# Altium PCB MotorControllerInterface.PcbDoc
Units mm, origin at the board's own origin, x right, y up, seen from the top; angles counter-clockwise.
Board outline 50 x 50 mm, 2 copper layers (Top Layer, Bottom Layer); 33 components, 24 nets, 214 pads, 53 vias.
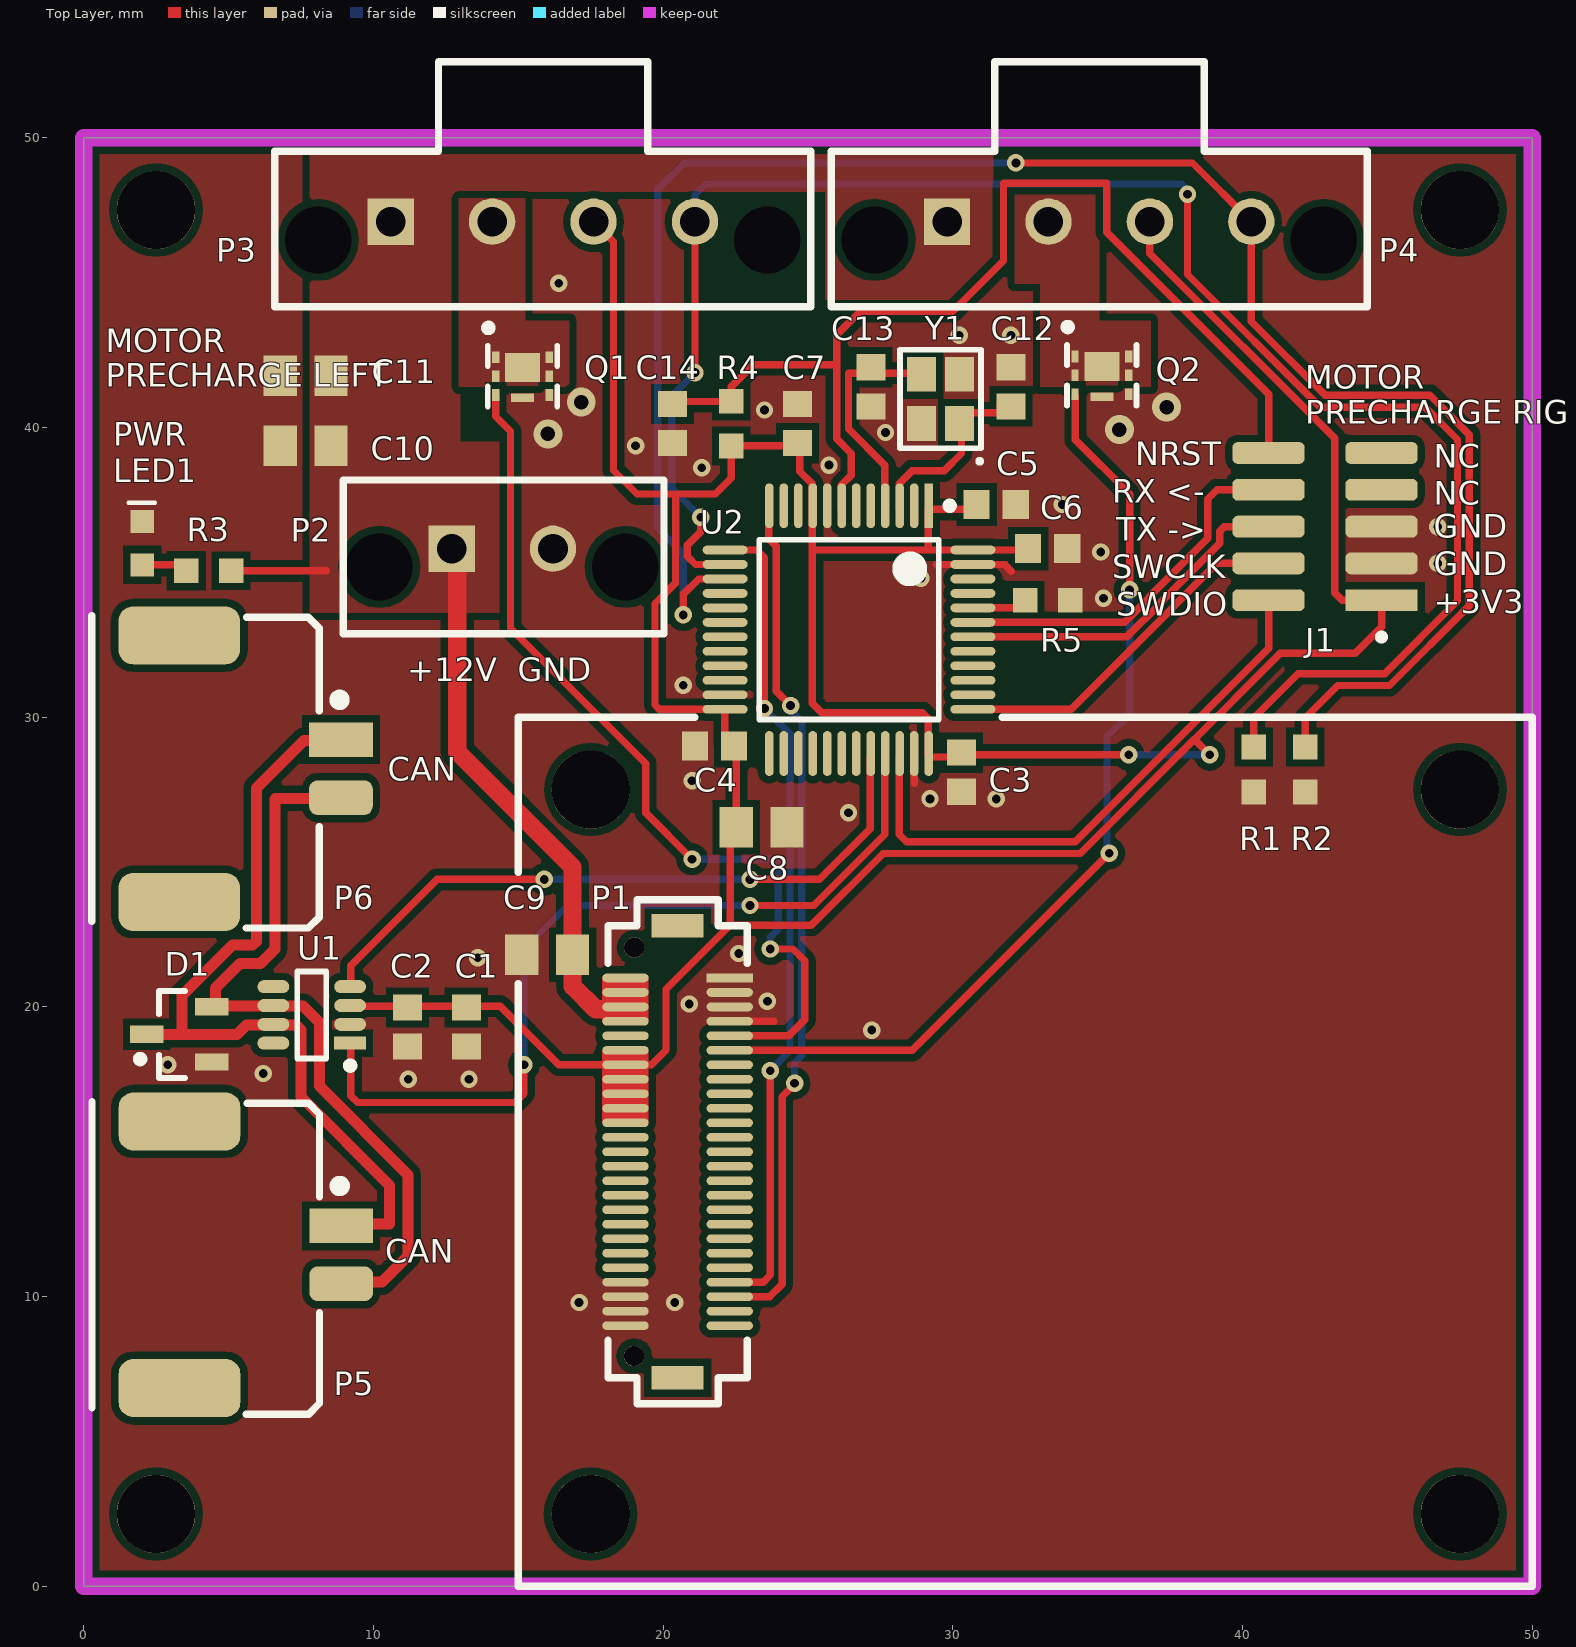
[diagram p0: Top Layer view]
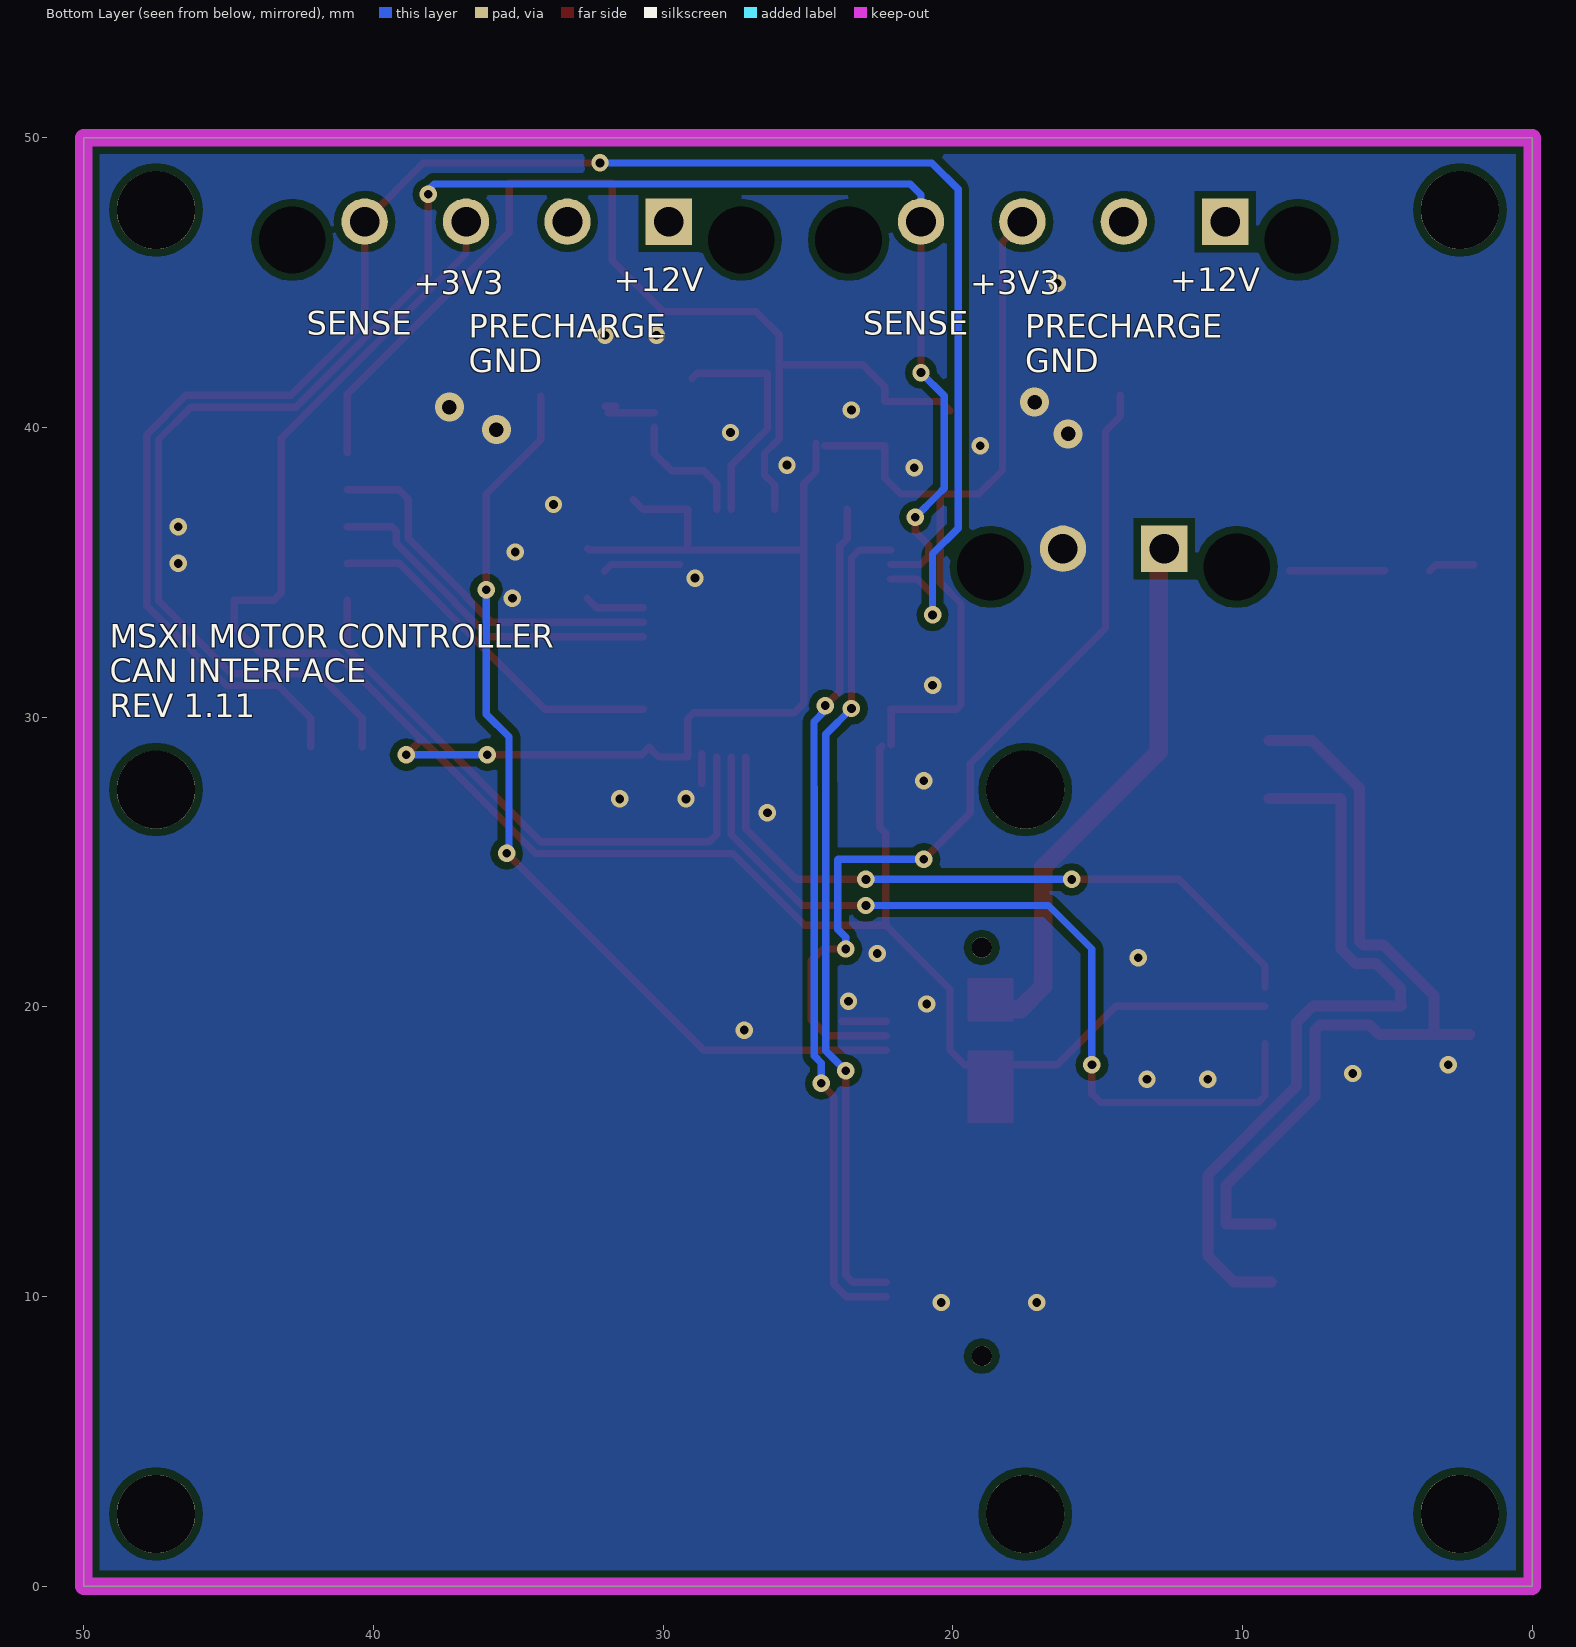
[diagram p1: Bottom Layer view, seen from below]
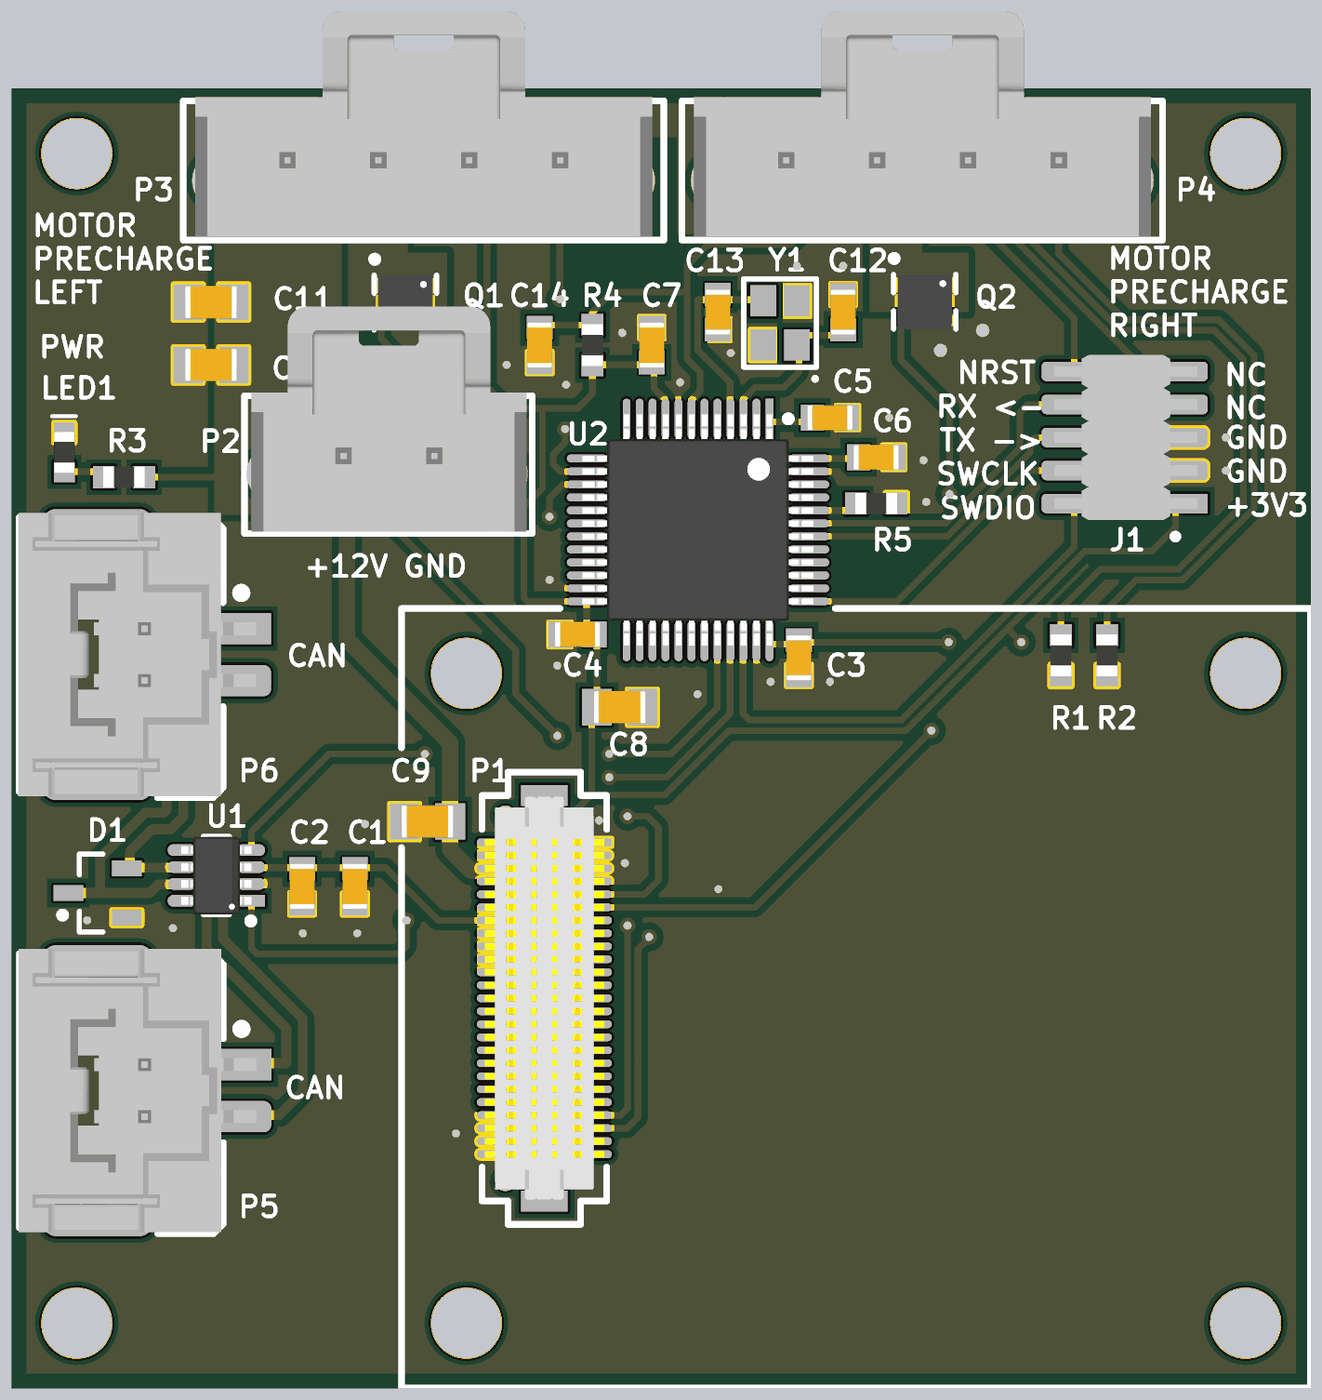
[diagram p2: 3D render of the assembled board from above, using the file's embedded part models]

## Layer stack, top to bottom
Top Solder: solder mask 0.0102, Solder Resist, Dk 3.5
Top Layer: signal copper 0.0356
Dielectric 1: dielectric 0.32, FR-4, Dk 4.8
Bottom Layer: signal copper 0.0356
Bottom Solder: solder mask 0.0102, Solder Resist, Dk 3.5

## Board outline
0,0 50,0 50,50 0,50

## Design rules (kind name [scope] priority, off if disabled: settings)
Clearance [All] p1: gap=0.254 ignorepadtopadclearanceinfootprint=FALSE except(0: Arc-Hole Track-Hole SMDPad-Hole THPad-Hole Via-Hole Fill-Hole Poly-Hole Region-Hole Text-Hole; 0.152: Arc-Arc Arc-Track Arc-SMDPad Track-Track Track-SMDPad SMDPad-SMDPad)
DiffPairsRouting [All] p1: maxlimit=0.254 minlimit=0.254 mostfreqgap=0.254 toplayer_minwidth=0.381 toplayer_maxwidth=0.381 toplayer_prefwidth=0.381 bottomlayer_minwidth=0.381 bottomlayer_maxwidth=0.381 bottomlayer_prefwidth=0.381 maxuncoupledlength=12.7
PolygonConnect [All] p1: connectstyle=Direct reliefconductorwidth=0.254 reliefentries=4 polygonreliefangle="90 Angle" airgapwidth=0.254
RoutingVias [All] p1: holewidth=0.711 width=1.27 viastyle="Through Hole" minholewidth=0.711 minwidth=1.27 maxholewidth=0.711 maxwidth=1.27
SolderMaskExpansion [All] p1: expansion=0.102
Width [All] p1: maxlimit=1.27 minlimit=0.254 preferedwidth=0.254 minimp=50.000000 maximp=50.000000 favimp=50.000000
29 further rules are at their usual default settings.

## Classes and differential pairs
component class Mezzanine: P1
differential pair CAN: +CAN_P -CAN_N

## Components (designator, comment, footprint, x,y, rotation, side; value= is the part's Value field where it differs from the comment)
C1 "CAP CER 4.7UF 25V 10% X5R 0603" "CAP, 0603" 13.208,19.304 r270 top
C2 "CAP CER 0.1UF 50V 10% X7R 0603" "CAP, 0603" 11.176,19.304 r270 top
C3 "CAP CER 0.1UF 50V 10% X7R 0603" "CAP, 0603" 30.3,28.1 r270 top
C4 "CAP CER 0.1UF 50V 10% X7R 0603" "CAP, 0603" 21.775,29 r180 top
C5 "CAP CER 0.1UF 50V 10% X7R 0603" "CAP, 0603" 31.496,37.338 r0 top
C6 "CAP CER 0.1UF 50V 10% X7R 0603" "CAP, 0603" 33.274,35.814 r0 top
C7 "CAP CER 0.1UF 50V 10% X7R 0603" "CAP, 0603" 24.638,40.132 r90 top
C8 "CAP CER 10uF 25V 10% X5R 0805" "CAP, 0805" 23.4,26.2 r0 top
C9 "CAP CER 10uF 25V 10% X5R 0805" "CAP, 0805" 16,21.8 r180 top
C10 "CAP CER 10uF 25V 10% X5R 0805" "CAP, 0805" 7.666,39.37 r180 top
C11 "CAP CER 10uF 25V 10% X5R 0805" "CAP, 0805" 7.666,41.783 r180 top
C12 "CAP CER 15PF 50V ±5% NPO 0603" "CAP, 0603" 32.004,41.402 r90 top
C13 "CAP CER 15PF 50V ±5% NPO 0603" "CAP, 0603" 27.178,41.402 r270 top
C14 "CAP CER 0.1UF 50V 10% X7R 0603" "CAP, 0603" 20.32,40.132 r270 top
D1 "DIODE TVS 24VWM 70VC SOT23" SOT23 3.302,19.05 r180 top
J1 "CONN 10POS HEADR MALE 0.05\"" "CONN, 10POS 0.05\" Debug Header" 44.794,34.036 r90 top
LED1 "LED GREEN CLEAR 2V 0603" LED_0603 2.032,35.306 r90 top
P1 "CONN 50POS Bergstak Plug 0.02\"" "CONN, Bergstak 50 Pos Plug" 20.5,15 r0 top
P2 "CONN 2POS ULTRA-FIT 0.138\"" "CONN, 2POS ULTRA-FIT" 12.7,35.814 r0 top
P3 "CONN 4POS ULTRA-FIT 0.138\"" "CONN, 4POS ULTRA-FIT" 10.6,47.1 r0 top
P4 "CONN 4POS ULTRA-FIT 0.138\"" "CONN, 4POS ULTRA-FIT" 29.8,47.1 r0 top
P5 "Dura-Clik" "CONN, 2POS Dura-Click Vertical" 8.89,12.446 r270 top
P6 "Dura-Clik" "CONN, 2POS Dura-Click Vertical" 8.882,29.222 r270 top
Q1 "MOSFET N-CH 30V 8.7A 2.1W 6-PQFN (2x2)" "MOSFET N-CH 30V 12A 2mmx2mm PQFN" 14.224,42.418 r270 top
Q2 "MOSFET N-CH 30V 8.7A 2.1W 6-PQFN (2x2)" "MOSFET N-CH 30V 12A 2mmx2mm PQFN" 34.218,42.448 r270 top
R1 "RES 10K OHM 1% 1/10W 0603" "RES, 0603" 40.386,28.194 r270 top
R2 "RES 10K OHM 1% 1/10W 0603" "RES, 0603" 42.164,28.194 r270 top
R3 "RES 4.7K OHM 1% 1/10W 0603" "RES, 0603" 4.318,35.052 r180 top
R4 "RES 100K OHM 5% 1/8W 0603" "RES, 0603" 22.352,40.132 r90 top
R5 "RES 510 OHM 5% 1/10W 0603" "RES, 0603" 33.274,34.036 r180 top
U1 "IC CAN Tranceiver TCAN332DR" TSOP65P280X145-8N 7.874,19.724 r180 top
U2 "IC MCU 32BIT 128KB FLASH 48LQFP" TSQFP50P890X890X160-48M 26.416,33.02 r270 top
Y1 "CRYSTAL 32 MHz 8pF 4-SMD" "CX2520DB CRYSTAL" 30.226,40.132 r90 top

## Footprints (in the part's own frame and the unit in brackets; to place one, negate y for a bottom-side part, rotate by r counter-clockwise, add the part's x,y. Pads: shape width x height; smd on the part's side, far side on the other; paste and mask are expansions set on the pad)
"CAP, 0603" [mm] "Chip Capacitor, 2-Leads, Body 1.60x0.81mm, IPC Medium Density"
  rect 0.9x1 smd mask+0.076: 1(-0.675,0) 2(0.675,0)
  body extent -0.87,-0.48 0.87,0.48, height 0.9
"CAP, 0805" [mm] "Chip Capacitor, 2-Leads, Body 2.00x1.25mm, IPC Medium Density"
  rect 1.15x1.4 smd: 1(-0.875,0) 2(0.875,0)
  body extent -1,-0.63 1,0.63, height 1.25
"CONN, 2POS Dura-Click Vertical" [mm] "WM7169CT-ND"
  rect 1.2x2.2 smd: 1(0,0)
  rrect50% 1.2x2.2 smd: 2(2,0)
  rrect50% 2x4.2 smd: 3(-3.6,-5.58) 3(5.6,-5.58)
  silkscreen extent -4.28,-8.6 6.5,0.05, body extent -4.45,-8.63 6.45,0.52, height 8
"CONN, 2POS ULTRA-FIT" [mm] "2 Positions Header, Shrouded Connector 0.138\" (3.50mm) Through Hole Gold"
  rect 1.6x1.6 hole 1.02: 1(0,0)
  round 1.6 hole 1.02: 2(3.5,0)
  round 1.6 hole 2.3: ""(-2.5,-0.63) ""(6,-0.63)
  silkscreen extent -3.74,-2.93 7.33,2.37, body extent -3.48,-2.87 7.12,5.79, height 13.85
"CONN, 4POS ULTRA-FIT" [mm]
  rect 1.6x1.6 hole 1.02: 1(0,0)
  round 1.6 hole 1.02: 2(3.5,0) 3(7,0) 4(10.5,0)
  round 0 hole 2.3: ""(-2.5,-0.63) ""(13,-0.63)
  silkscreen extent -4,-2.93 14.5,5.53, body extent -3.54,-2.78 14.06,5.88, height 13.85
"CONN, 10POS 0.05\" Debug Header" [mm] "Amphenol 10 Positions Header Connector 0.050\" (1.27mm) Surface Mount Gold"
  rect 0.75x2.5 smd: 1(0,0)
  rrect50% 0.75x2.5 smd: 2(0,3.9) 3(1.27,0) 4(1.27,3.9) 5(2.54,0) 6(2.54,3.9) 7(3.81,0) 8(3.81,3.9) 9(5.08,0) 10(5.08,3.9)
  silkscreen extent -1.37,-0.1 -1.17,0.1, body extent -0.63,-0.84 5.72,4.66, height 4.5
"CONN, Bergstak 50 Pos Plug" [mm] "Bergstak 50 Position Plug"
  rect 1.6x0.3 smd: 1(1.8,6)
  oval 1.6x0.3 smd: 2(1.8,5.5) 3(1.8,5) 4(1.8,4.5) 5(1.8,4) 6(1.8,3.5) 7(1.8,3) 8(1.8,2.5) 9(1.8,2) 10(1.8,1.5) 11(1.8,1) 12(1.8,0.5) 13(1.8,0) 14(1.8,-0.5) 15(1.8,-1) 16(1.8,-1.5) 17(1.8,-2) 18(1.8,-2.5) 19(1.8,-3) 20(1.8,-3.5) 21(1.8,-4) 22(1.8,-4.5) 23(1.8,-5) 24(1.8,-5.5) 25(1.8,-6) 26(-1.8,-6) 27(-1.8,-5.5) 28(-1.8,-5) 29(-1.8,-4.5) 30(-1.8,-4) 31(-1.8,-3.5) 32(-1.8,-3) 33(-1.8,-2.5) 34(-1.8,-2) 35(-1.8,-1.5) 36(-1.8,-1) 37(-1.8,-0.5) 38(-1.8,0) 39(-1.8,0.5) 40(-1.8,1) 41(-1.8,1.5) 42(-1.8,2) 43(-1.8,2.5) 44(-1.8,3) 45(-1.8,3.5) 46(-1.8,4) 47(-1.8,4.5) 48(-1.8,5) 49(-1.8,5.5) 50(-1.8,6)
  round 0.7 hole 0.7: ""(-1.5,-7.05) ""(-1.5,7.05)
  rect 1.8x0.8 smd: ""(0,-7.8) ""(0,7.8)
  silkscreen extent -2.4,-8.7 2.4,8.7, body extent -2.3,-7.75 2.3,7.75, height 4.2
"CX2520DB CRYSTAL" [mm]
  rect 1.2x1 smd: 1(0,0) 2(1.7,0) 3(1.7,1.3) 4(0,1.3)
  silkscreen extent -1.35,-0.75 2.55,2.05, body extent -0.4,-0.35 2.1,1.65, height 0.5
LED_0603 [mm]
  rect 0.8x0.8 smd: 1(-0.05,0.01) 2(1.45,0.01)
  silkscreen extent 2.09,-0.43 2.09,0.48, body extent -0.1,-0.39 1.5,0.41, height 0.55
"MOSFET N-CH 30V 12A 2mmx2mm PQFN" [mm] "PQFN, 6-Leads, Body 2.00x2.00mm, Pitch 0.65mm/0.50mm, Thermal Pad 1.00x1.20mm, IPC Medium Density"
  rect 0.4x0.25 smd: 1(0,0) 2(0.65,0) 3(1.3,0) 4(1.3,1.85) 5(0.65,1.85) 6(0,1.85)
  rect 1x1.2 smd: 7(0.35,0.925)
  rect 0.3x0.79 smd: 8(1.39,0.925)
  silkscreen extent -1.14,-0.38 1.7,2.12, body extent -0.4,-0.13 1.7,1.97, height 1
"RES, 0603" [mm] "Chip Resistor, 2-Leads, Body 1.60x0.80mm, IPC Medium Density"
  rect 0.85x0.85 smd: 1(-0.775,0) 2(0.775,0)
  body extent -0.8,-0.4 0.8,0.4, height 0.55
SOT23 [mm] "SOT23, 3-Leads, Body 2.9x1.3mm, Pitch 0.95mm, Lead Span 2.3mm - Reverse Pinning, IPC Medium Density"
  rect 1.15x0.6 smd: 1(1.125,0) 2(-1.125,-0.95) 3(-1.125,0.95)
  silkscreen extent -0.2,-1.5 1.47,1.5, body extent -0.7,-1.5 0.7,1.5, height 1.1
TSOP65P280X145-8N [mm] "TSOP, 8-Leads, Body 2.90x1.60mm, Pitch 0.65mm, IPC Medium Density"
  rect 1.1x0.45 smd: 1(-1.325,0.975)
  oval 1.1x0.45 smd: 2(-1.325,0.325) 3(-1.325,-0.325) 4(-1.325,-0.975) 5(1.325,-0.975) 6(1.325,-0.325) 7(1.325,0.325) 8(1.325,0.975)
  silkscreen extent -1.45,-1.5 0.5,1.87, body extent -1.39,-1.5 1.39,1.5, height 1.45
TSQFP50P890X890X160-48M [mm] "TSQFP, 48-Leads, Body 7.00x7.00mm, Pitch 0.50mm, IPC Low Density"
  rect 1.55x0.3 smd: 1(-4.275,2.75)
  oval 1.55x0.3 smd: 2(-4.275,2.25) 3(-4.275,1.75) 4(-4.275,1.25) 5(-4.275,0.75) 6(-4.275,0.25) 7(-4.275,-0.25) 8(-4.275,-0.75) 9(-4.275,-1.25) 10(-4.275,-1.75) 11(-4.275,-2.25) 12(-4.275,-2.75) 25(4.275,-2.75) 26(4.275,-2.25) 27(4.275,-1.75) 28(4.275,-1.25) 29(4.275,-0.75) 30(4.275,-0.25) 31(4.275,0.25) 32(4.275,0.75) 33(4.275,1.25) 34(4.275,1.75) 35(4.275,2.25) 36(4.275,2.75)
  oval 0.3x1.55 smd: 13(-2.75,-4.275) 14(-2.25,-4.275) 15(-1.75,-4.275) 16(-1.25,-4.275) 17(-0.75,-4.275) 18(-0.25,-4.275) 19(0.25,-4.275) 20(0.75,-4.275) 21(1.25,-4.275) 22(1.75,-4.275) 23(2.25,-4.275) 24(2.75,-4.275) 37(2.75,4.275) 38(2.25,4.275) 39(1.75,4.275) 40(1.25,4.275) 41(0.75,4.275) 42(0.25,4.275) 43(-0.25,4.275) 44(-0.75,4.275) 45(-1.25,4.275) 46(-1.75,4.275) 47(-2.25,4.275) 48(-2.75,4.275)
  silkscreen extent -4.4,-3.1 3.1,3.6, body extent -4.45,-4.45 4.45,4.45, height 1.6

## Part data
C1: "4.7µF ±10% 25V Ceramic Capacitor X5R 0603 (1608 Metric)", Capacitance=4.7µF, Manufacturer 1="Murata Electronics North America", Manufacturer Part Number 1=GRM188R61E475KE11D, Operating Temperature="-55°C ~ 85°C", Package / Case="0603 (1608 Metric)", Ratings=-, Supplier Part Number 1=490-7203-1-ND, Temperature Coefficient=X5R, Tolerance=±10%, Voltage=25V, ComponentLink1Description=http://www.murata.com/~/media/webrenewal/support/library/catalog/products/capacitor/mlcc/c02e.ashx, ComponentLink1URL=http://www.murata.com/~/media/webrenewal/support/library/catalog/products/capacitor/mlcc/c02e.ashx, Height - Seated (Max)=-, Lead Spacing=-, Lead Style=-, Mounting Type="Surface Mount, MLCC", Packaging="Cut Tape (CT)", Part Status=Active, Size / Dimension="0.063\" L x 0.031\" W (1.60mm x 0.80mm)", Supplier 1=Digi-Key, Thickness (Max)="0.031\" (0.80mm)"
C2 C3 C4 C5 C6 C7 C14: "0.10µF ±10% 50V Ceramic Capacitor X7R 0603 (1608 Metric)", Capacitance=0.1µF, Manufacturer 1="AVX Corporation", Manufacturer Part Number 1=06035C104KAT2A, Operating Temperature="-55°C ~ 125°C", Package / Case="0603 (1608 Metric)", Ratings=-, Supplier Part Number 1=478-5052-1-ND, Temperature Coefficient=X7R, Tolerance=±10%, Voltage=50V, ComponentLink1Description=http://datasheets.avx.com/X7RDielectric.pdf, ComponentLink1URL=http://datasheets.avx.com/X7RDielectric.pdf, Height - Seated (Max)=-, Lead Spacing=-, Lead Style=-, Mounting Type="Surface Mount, MLCC", Packaging="Cut Tape (CT)", Part Status=Active, Size / Dimension="0.063\" L x 0.032\" W (1.60mm x 0.81mm)", Supplier 1=Digi-Key, Thickness (Max)="0.035\" (0.90mm)"
C8 C9 C10 C11: "10µF ±10% 25V Ceramic Capacitor X5R 0805 (2012 Metric)", Capacitance=10µF, Manufacturer="Murata Electronics North America", Manufacturer Part Number=GRM21BR61E106KA73L, Operating Temperature="-55°C ~ 85°C", Package / Case="0805 (2012 Metric)", Ratings=-, Supplier Part Number 1=490-5523-1-ND, Temperature Coefficient=X5R, Tolerance=±10%, Voltage - Rated=25V, Applications="General Purpose", Category=Capacitors, ComponentLink1Description=http://search.murata.co.jp/Ceramy/image/img/A01X/G101/ENG/GRM21BR61E106KA73-01.pdf, ComponentLink1URL=http://search.murata.co.jp/Ceramy/image/img/A01X/G101/ENG/GRM21BR61E106KA73-01.pdf, Features=-, Height - Seated (Max)=-, Lead Spacing=-, Lead Style=-, Mounting Type="Surface Mount, MLCC", Packaging="Cut Tape (CT)", Part Status=Active, Pricing 1="1=0.3, 10=0.214, 100=0.1008, 500=0.07068, 1000=0.05851 (CAD)", RoHS="RoHS Compliant", Size / Dimension="0.079\" L x 0.049\" W (2.00mm x 1.25mm)", Stock 1=1695157, Supplier 1=Digi-Key, Thickness (Max)="0.053\" (1.35mm)"
C12 C13: "15pF ±5% 50V Ceramic Capacitor C0G, NP0 0603 (1608 Metric)", Capacitance=15pF, Manufacturer 1=Yageo, Manufacturer Part Number 1=CC0603JRNPO9BN150, Operating Temperature="-55°C ~ 125°C", Package / Case="0603 (1608 Metric)", Ratings=-, Supplier Part Number 1=311-1060-1-ND, Temperature Coefficient="C0G, NP0", Tolerance=±5%, Voltage=50V, ComponentLink1Description=http://www.yageo.com/documents/recent/UPY-GP_NP0_16V-to-50V_16.pdf, ComponentLink1URL=http://www.yageo.com/documents/recent/UPY-GP_NP0_16V-to-50V_16.pdf, Failure Rate=-, Height - Seated (Max)=-, Lead Spacing=-, Lead Style=-, Mounting Type="Surface Mount, MLCC", Packaging="Cut Tape (CT)", Part Status=Active, Size / Dimension="0.063\" L x 0.031\" W (1.60mm x 0.80mm)", Supplier 1=Digi-Key, Thickness (Max)="0.035\" (0.90mm)"
D1: "TVS DIODE 24VWM 70VC SOT23", Capacitance @ Frequency="11pF @ 1MHz", Current - Peak Pulse (10/1000µs)="3A (8/20µs)", Manufacturer 1="Nexperia USA Inc.", Manufacturer Part Number 1=PESD1CAN,215, Operating Temperature="-65°C ~ 150°C (TA)", Package / Case="TO-236-3, SC-59, SOT-23-3", Power - Peak Pulse=200W, Power Line Protection=No, Supplier Device Package="SOT-23 (TO-236AB)", Supplier Part Number 1=1727-3817-1-ND, Voltage - Breakdown (Min)=25.4V, Voltage - Clamping (Max) @ Ipp=70V, ComponentLink1Description=http://assets.nexperia.com/documents/data-sheet/PESD1CAN.pdf, ComponentLink1URL=http://assets.nexperia.com/documents/data-sheet/PESD1CAN.pdf, Mounting Type="Surface Mount", Packaging="Cut Tape (CT)", Part Status=Active, Supplier 1=Digi-Key, Type=Zener
J1: "10 Positions Header Connector 0.050\" (1.27mm) Surface Mount Gold", Current Rating=-, Insulation Color=Black, Manufacturer 1="Amphenol FCI", Manufacturer Part Number 1=20021121-00010C4LF, Material Flammability Rating="UL94 V-0", Supplier Part Number 1=609-3695-1-ND, ComponentLink1Description=http://portal.fciconnect.com/Comergent//fci/drawing/20021121.pdf, ComponentLink1URL=http://portal.fciconnect.com/Comergent//fci/drawing/20021121.pdf, Connector Type=Header, Contact Finish - Mating=Gold, Contact Finish - Post=Tin, Contact Finish Thickness - Mating="10µin (0.25µm)", Contact Finish Thickness - Post="50µin (1.27µm)", Contact Length - Mating="0.120\" (3.05mm)", Contact Length - Post=-, Contact Material="Copper Alloy", Contact Shape=Square, Contact Type="Male Pin", Fastening Type=-, Ingress Protection=-, Insulation Height=-, Insulation Material=Thermoplastic, Mated Stacking Heights=-, Mounting Type="Surface Mount", Number of Positions=10, Number of Positions Loaded=All, Number of Rows=2, Operating Temperature=-, Overall Contact Length=-, Packaging="Cut Tape (CT)", Part Status=Active, Pitch - Mating="0.050\" (1.27mm)", Row Spacing - Mating="0.050\" (1.27mm)", Shrouding=Unshrouded, Style="Board to Board", Supplier 1=Digi-Key, Termination=Solder, Voltage=-
LED1: "Green 572nm LED Indication - Discrete 2V 0603 (1608 Metric)", Color=Green, Current - Test=20mA, Lens Color=Colorless, Manufacturer="Wurth Electronics Inc.", Manufacturer Part Number=150060VS75000, Millicandela Rating=40mcd, Package / Case="0603 (1608 Metric)", Supplier Device Package=0603, Supplier Part Number 1=732-4980-1-ND, Voltage - Forward (Vf) (Typ)=2V, Category=Optoelectronics, ComponentLink1Description=http://katalog.we-online.de/led/datasheet/150060VS75000.pdf, ComponentLink1URL=http://katalog.we-online.de/led/datasheet/150060VS75000.pdf, Features=-, Height (Max)=0.80mm, Lens Style/Size="Rectangle with Flat Top, 1.10mm x 0.70mm", Lens Transparency=Clear, Mounting Type="Surface Mount", Packaging="Cut Tape (CT)", Part Status=Active, Pricing 1="1=0.21, 100=0.1617, 500=0.13964 (CAD)", RoHS="RoHS Compliant", Size / Dimension="1.60mm L x 0.80mm W", Stock 1=9408, Supplier 1=Digi-Key, Viewing Angle=140°, Wavelength - Dominant=570nm, Wavelength - Peak=572nm
P1: "50 Position Connector Plug, Outer Shroud Contacts Surface Mount Gold", Manufacturer 1="Amphenol FCI", Manufacturer Part Number 1=10132797-055100LF, Supplier Part Number 1=609-5226-1-ND, ComponentLink1Description=http://portal.fciconnect.com/Comergent//fci/drawing/10132797.pdf, ComponentLink1URL=http://portal.fciconnect.com/Comergent//fci/drawing/10132797.pdf, Connector Type="Plug, Outer Shroud Contacts", Contact Finish=Gold, Contact Finish Thickness="1µin (0.025µm)", Height Above Board="0.169\" (4.30mm)", Mated Stacking Heights=5mm, Mounting Type="Surface Mount", Number of Positions=50, Number of Rows=2, Packaging="Cut Tape (CT)", Part Status=Active, Pitch="0.020\" (0.50mm)", Series="BergStak Plug", Supplier 1=Digi-Key
P2: "2 Positions Header, Shrouded Connector 0.138\" (3.50mm) Through Hole Gold", Current Rating=-, Insulation Color=Black, Manufacturer 1="Molex, LLC", Manufacturer Part Number 1=1722861302, Material Flammability Rating="UL94 V-0", Operating Temperature="-40°C ~ 120°C", Supplier Part Number 1=WM11673-ND, Voltage=400V, ComponentLink1Description=http://www.molex.com/pdm_docs/sd/1722861302_sd.pdf, ComponentLink1URL=http://www.molex.com/pdm_docs/sd/1722861302_sd.pdf, Connector Type=Header, Contact Finish - Mating=Gold, Contact Finish - Post=Tin, Contact Finish Thickness - Mating="30µin (0.76µm)", Contact Finish Thickness - Post="60µin (1.52µm)", Contact Length - Mating=-, Contact Length - Post="0.126\" (3.20mm)", Contact Material="Copper Alloy", Contact Shape=Square, Contact Type="Male Pin", Fastening Type="Latch Holder", Ingress Protection=-, Insulation Height="0.465\" (11.80mm)", Insulation Material="Liquid Crystal Polymer (LCP)", Mated Stacking Heights=26.99mm, Mounting Type="Through Hole", Number of Positions=2, Number of Positions Loaded=All, Number of Rows=1, Overall Contact Length=-, Packaging=Tray, Part Status=Active, Pitch - Mating="0.138\" (3.50mm)", Row Spacing - Mating=-, Series=UltraFit, Shrouding="Shrouded - 4 Wall", Style="Board to Board or Cable", Supplier 1=Digi-Key, Termination="Kinked Pin, Solder"
P3 P4: "4 Positions Header Connector 0.138\" (3.50mm) Through Hole Tin", Current Rating=-, Insulation Color=Black, Manufacturer 1="Molex, LLC", Manufacturer Part Number 1=1722871104, Material Flammability Rating="UL94 V-0", Operating Temperature="-40°C ~ 105°C", Supplier Part Number 1=WM11703-ND, Voltage=400V, ComponentLink1Description=http://www.molex.com/pdm_docs/sd/1722871104_sd.pdf, ComponentLink1URL=http://www.molex.com/pdm_docs/sd/1722871104_sd.pdf, Connector Type=Header, Contact Finish - Mating=Tin, Contact Finish - Post=Tin, Contact Finish Thickness - Mating="60µin (1.52µm)", Contact Finish Thickness - Post="60µin (1.52µm)", Contact Length - Mating=-, Contact Length - Post="0.126\" (3.20mm)", Contact Material="Copper Alloy", Contact Shape=Square, Contact Type="Male Pin", Fastening Type="Latch Holder", Ingress Protection=-, Insulation Height="0.465\" (11.80mm)", Insulation Material="Liquid Crystal Polymer (LCP)", Mated Stacking Heights=26.99mm, Mounting Type="Through Hole", Number of Positions=4, Number of Positions Loaded=All, Number of Rows=1, Overall Contact Length=-, Packaging=Tray, Part Status=Active, Pitch - Mating="0.138\" (3.50mm)", Row Spacing - Mating=-, Series=UltraFit, Shrouding="Shrouded - 4 Wall", Style="Board to Cable/Wire", Supplier 1=Digi-Key, Termination=Solder
P5 P6: library part "CONN 2POS DURA-CLIK 0.079\" VERT", "2 Positions Header, Shrouded Connector 0.079\" (2.00mm) Surface Mount, Vertical Tin", Current Rating=-, Insulation Color=Natural, Manufacturer="Molex, LLC", Manufacturer Part Number=5600200220, Supplier Part Number 1=WM10862CT-ND, Applications="Automotive, Industrial", Category="Connectors, Interconnects", ComponentLink1Description=http://www.molex.com/pdm_docs/sd/5600200220_sd.pdf, ComponentLink1URL=http://www.molex.com/pdm_docs/sd/5600200220_sd.pdf, Connector Type=Header, Contact Finish - Mating=Tin, Contact Finish - Post=Tin, Contact Finish Thickness - Mating=-, Contact Finish Thickness - Post=-, Contact Length - Mating=-, Contact Length - Post=-, Contact Material="Copper Alloy", Contact Shape=Square, Contact Type="Male Pin", Fastening Type="Latch Lock", Features="Solder Retention", Ingress Protection=-, Insulation Height="0.315\" (8.00mm)", Insulation Material="Polyamide (PA), Nylon", Mated Stacking Heights=9.3mm, Material Flammability Rating=-, Mounting Type="Surface Mount", Number of Positions=2, Number of Positions Loaded=All, Number of Rows=1, Operating Temperature=-, Overall Contact Length=-, Packaging="Cut Tape (CT)", Part Status=Active, Pitch - Mating="0.079\" (2.00mm)", Pricing 1="1=1.16, 10=1.012, 25=0.952, 50=0.9122, 100=0.8727, 250=0.79336 (CAD)", RoHS="RoHS Compliant", Row Spacing - Mating=-, Shrouding="Shrouded - 4 Wall", Stock 1=11912, Style="Board to Cable/Wire", Supplier 1=Digi-Key, Termination=Solder, Voltage Rating=-
Q1 Q2: Current - Continuous Drain (Id) @ 25°C=8.7A, Drain to Source Voltage (Vdss)=30V, Drive Voltage (Max Rds On,  Min Rds On)="2.5V, 4.5V", Input Capacitance (Ciss) (Max) @ Vds="1019pF @ 25V", Manufacturer 1="Infineon Technologies", Manufacturer Part Number 1=IRLHS6342TRPBF, Operating Temperature="-55°C ~ 150°C (TJ)", Package / Case=6-PowerVDFN, Power Dissipation (Max)=2.1W, Supplier Device Package="6-PQFN (2x2)", Supplier Part Number 1=IRLHS6342TRPBFCT-ND, Category="Discrete Semiconductor Products", ComponentLink1Description=http://www.infineon.com/dgdl/irlhs6342pbf.pdf?fileId=5546d462533600a401535663b52625ad, ComponentLink1URL=http://www.infineon.com/dgdl/irlhs6342pbf.pdf?fileId=5546d462533600a401535663b52625ad, Description 1="MOSFET N-CH 30V 8.7A 2X2 PQFN", FET Feature=-, FET Type=N-Channel, Gate Charge (Qg) (Max) @ Vgs="11nC @ 4.5V", Mounting Type="Surface Mount", Packaging="Cut Tape (CT)", Part Status=Active, Pricing 1="1=0.79, 10=0.685, 100=0.5118, 500=0.4022, 1000=0.31079 (CAD)", Rds On (Max) @ Id, Vgs="15.5 mOhm @ 8.5A, 4.5V", RoHS="RoHS Compliant", Stock 1=9984, Supplier 1=Digi-Key, Technology="MOSFET (Metal Oxide)", Vgs (Max)=±12V, Vgs(th) (Max) @ Id="1.1V @ 10µA"
R1 R2: "RES SMD 10K OHM 1% 1/10W 0603", Manufacturer 1=Yageo, Manufacturer Part Number 1=RC0603FR-0710KL, Operating Temperature="-55°C ~ 155°C", Package / Case="0603 (1608 Metric)", Power=1/10W, Resistance=10k, Supplier Device Package=0603, Supplier Part Number 1=311-10.0KHRCT-ND, Temperature Coefficient=±100ppm/°C, Tolerance=±1%, ComponentLink1Description=http://www.yageo.com/documents/recent/PYu-RC_Group_51_RoHS_L_7.pdf, ComponentLink1URL=http://www.yageo.com/documents/recent/PYu-RC_Group_51_RoHS_L_7.pdf, Composition="Thick Film", Failure Rate=-, Height - Seated (Max)="0.022\" (0.55mm)", Packaging="Cut Tape (CT)", Part Status=Active, Size / Dimension="0.063\" L x 0.031\" W (1.60mm x 0.80mm)", Supplier 1=Digi-Key
R3: "4.7k Ohm ±1% 0.1W, 1/10W Chip Resistor 0603 (1608 Metric) Moisture Resistant Thick Film", Manufacturer 1=Yageo, Manufacturer Part Number 1=RC0603FR-074K7L, Operating Temperature="-55°C ~ 155°C", Package / Case="0603 (1608 Metric)", Power (Watts)=1/10W, Resistance (Ohms)=4.7k, Supplier Device Package=0603, Supplier Part Number 1=311-4.70KHRCT-ND, Temperature Coefficient=±100ppm/°C, Tolerance=±1%, Category=Resistors, ComponentLink1Description=http://www.yageo.com/documents/recent/PYu-RC_Group_51_RoHS_L_7.pdf, ComponentLink1URL=http://www.yageo.com/documents/recent/PYu-RC_Group_51_RoHS_L_7.pdf, Composition="Thick Film", Description 1="RES SMD 4.7K OHM 1% 1/10W 0603", Failure Rate=-, Features="Moisture Resistant", Height - Seated (Max)="0.022\" (0.55mm)", Packaging="Cut Tape (CT)", Part Status=Active, Pricing 1="1=0.16, 10=0.022, 100=0.0089, 1000=0.00402, 2500=0.00349 (CAD)", RoHS="RoHS Compliant", Size / Dimension="0.063\" L x 0.031\" W (1.60mm x 0.80mm)", Stock 1=3487566, Supplier 1=Digi-Key
R4: "RES SMD 100K OHM 5% 1/10W 0603", Manufacturer 1=Yageo, Manufacturer Part Number 1=RC0603JR-07100KL, Operating Temperature="-55°C ~ 155°C", Package / Case="0603 (1608 Metric)", Power=1/10W, Resistance=100k, Supplier Device Package=0603, Supplier Part Number 1=311-100KGRCT-ND, Temperature Coefficient=±100ppm/°C, Tolerance=±5%, ComponentLink1Description=http://www.yageo.com/documents/recent/PYu-RC_Group_51_RoHS_L_7.pdf, ComponentLink1URL=http://www.yageo.com/documents/recent/PYu-RC_Group_51_RoHS_L_7.pdf, Composition="Thick Film", Failure Rate=-, Height - Seated (Max)="0.022\" (0.55mm)", Packaging="Cut Tape (CT)", Part Status=Active, Size / Dimension="0.063\" L x 0.031\" W (1.60mm x 0.80mm)", Supplier 1=Digi-Key
R5: "RES SMD 510 OHM 5% 1/10W 0603", Manufacturer 1=Yageo, Manufacturer Part Number 1=RC0603JR-07510RL, Operating Temperature="-55°C ~ 155°C", Package / Case="0603 (1608 Metric)", Power=1/10W, Resistance=510, Supplier Device Package=0603, Supplier Part Number 1=311-510GRCT-ND, Temperature Coefficient=±100ppm/°C, Tolerance=±5%, ComponentLink1Description=http://www.yageo.com/documents/recent/PYu-RC_Group_51_RoHS_L_7.pdf, ComponentLink1URL=http://www.yageo.com/documents/recent/PYu-RC_Group_51_RoHS_L_7.pdf, Composition="Thick Film", Failure Rate=-, Height - Seated (Max)="0.022\" (0.55mm)", Packaging="Cut Tape (CT)", Part Status=Active, Size / Dimension="0.063\" L x 0.031\" W (1.60mm x 0.80mm)", Supplier 1=Digi-Key
U1: "1/1 Transceiver CAN 8-SOIC", Digikey Part Number=296-43711-1-ND, Manufacturer Part Number=TCAN332DR, Supplier 1=Digi-Key, Supplier Part Number 1=296-43711-1-ND
U2: "ARM® Cortex®-M0 STM32 F0 Microcontroller IC 32-Bit 48MHz 128KB (128K x 8) FLASH 48-LQFP (7x7)", Manufacturer 1=STMicroelectronics, Manufacturer Part Number 1=STM32F072CBT6, Operating Temperature="-40°C ~ 85°C (TA)", Package / Case=48-LQFP, Supplier Device Package="48-LQFP (7x7)", Supplier Part Number 1=497-14645-ND, Voltage - Supply (Vcc/Vdd)="1.65 V ~ 3.6 V", ComponentLink1Description=http://www.st.com/content/ccc/resource/technical/document/datasheet/cd/46/43/83/22/d3/40/c8/DM00090510.pdf/files/DM00090510.pdf/jcr:content/translations/en.DM00090510.pdf, ComponentLink1URL=http://www.st.com/content/ccc/resource/technical/document/datasheet/cd/46/43/83/22/d3/40/c8/DM00090510.pdf/files/DM00090510.pdf/jcr:content/translations/en.DM00090510.pdf, Connectivity="CAN, HDMI-CEC, I²C, IrDA, LIN, SPI, UART/USART, USB", Core Processor="ARM® Cortex®-M0", Core Size=32-Bit, Data Converters="A/D 10x12b, D/A 2x12b", EEPROM Size=-, Number of I/O=37, Oscillator Type=Internal, Packaging=Tray, Part Status=Active, Peripherals="DMA, I²S, POR, PWM, WDT", Program Memory Size="128KB (128K x 8)", Program Memory Type=FLASH, RAM Size="16K x 8", Speed=48MHz, Supplier 1=Digi-Key
Y1: "32MHz ±15ppm Crystal 8pF 50 Ohm -40°C ~ 85°C AEC-Q200 Surface Mount 4-SMD, No Lead", ESR (Equivalent Series Resistance)="50 Ohm", Frequency=32MHz, Frequency Stability=±50ppm, Frequency Tolerance=±15ppm, Load Capacitance=8pF, Manufacturer 1="AVX Corp/Kyocera Corp", Manufacturer Part Number 1=CX2520DB32000D0GPSC1, Operating Mode=Fundamental, Operating Temperature="-40°C ~ 85°C", Package / Case="4-SMD, No Lead", Ratings=AEC-Q200, Supplier Part Number 1=1253-1730-1-ND, ComponentLink1Description=http://media.digikey.com/pdf/Data%20Sheets/AVX%20PDFs/CX2520DB_USY1M-H1-16428-00_Spec.pdf, ComponentLink1URL=http://media.digikey.com/pdf/Data%20Sheets/AVX%20PDFs/CX2520DB_USY1M-H1-16428-00_Spec.pdf, Height - Seated (Max)="0.022\" (0.55mm)", Mounting Type="Surface Mount", Packaging="Cut Tape (CT)", Part Status=Active, Size / Dimension="0.098\" L x 0.079\" W (2.50mm x 2.00mm)", Supplier 1=Digi-Key, Type="MHz Crystal"

## Free pads (board coordinates)
  round 2.7 hole 2.7: ""(2.5,2.5) ""(2.5,47.5) ""(17.5,2.5) ""(17.5,27.5) ""(47.5,2.5) ""(47.5,27.5) ""(47.5,47.5)

## Via types
v1: diameter 0.6, hole 0.3, Top Layer to Bottom Layer, tented both sides, 49 vias
v2: diameter 1, hole 0.5, Top Layer to Bottom Layer, tented both sides, 4 vias

## Nets (pads, with @x,y where several pads share a name; then routed paths per layer and width w, separated by ;. In a path a pad name is that pad's centre, name@x,y a point inside that pad or via, vN(x,y) a via of type N, cw(c..) or ccw(c..) an arc to the next point about the centre after c; other vN are vias at no path point)
+3V3: C1.1 C2.1 C3.1 C4.1 C5.1 C6.1 C7.1 C8.1 J1.1 P1.40 P1.41 P1.42 P1.43 P1.44 P1.45 P3.3 P4.3 R4.1 U1.3 U2.1 U2.9 U2.24 U2.36 U2.48 | length 132.9
  Top Layer w0.254: U1.3@9.225,20.025 14.375,20.025 16.4,18 P1.44 19.6,18 20.1,18.5 20.1,20.608 22.319,22.827 ; P3.3 18.288,46.412 18.288,38.512 19.1,37.7 21.8,37.7 22.352,38.252 22.352,39.37 C7.1@24.425,39.37 ; 20.431,37.7 20.431,34.636 19.719,33.924 19.719,30.418 19.867,30.27 U2.24 ; C4.1@22.125,29.05 U2.24@22.125,30.226 ; C4.1 22.525,28.925 C8.1 22.319,25.994 22.319,22.819 25.119,22.819 27.594,25.294 34.394,25.294 38.332,29.232 v1@38.884,28.68 ; C7.1@24.722,39.457 24.722,38.478 25.15,38.05 25.15,30.476 25.476,30.15 28.95,30.15 29.15,29.95 29.15,28.625 30.15,28.625 C3.1 30.481,28.955 30.734,28.702 v1(36.068,28.702) ; 25.15,35.77 U2.48 32.555,35.77 C6.1 ; 29.15,35.814 29.15,37.175 30.7,37.175 C5.1@31.025,37.5 ; P4.3 36.8,46.004 43.18,39.624 43.18,34.29 43.434,34.036 44.8,34.036 44.8,33.116 43.884,32.2 41.3,32.2 38.1,29 ; v1@38.862,28.658 v1(38.862,28.702)
  Bottom Layer w0.254: v1(36.068,28.702) v1(38.862,28.702)
+12V: C9.1 C10.1 C11.1 P1.47 P1.48 P1.49 P1.50 P2.1 P3.1 P4.1 R3.1 | length 22.5
  Top Layer w0.254: R3.1 8.382,35.052
  Top Layer w0.635: P2.1@12.9,35.9 12.9,28.8 16.875,24.825 C9.1 16.875,20.717 17.675,19.917 18.117,19.917 P1.49
BOOT0: R5.2 U2.44 | length 2.1
  Top Layer w0.254: U2.44 32.295,33.77 R5.2@32.625,34.1
CAN_N: D1.2 P5.2 P6.2 U1.6 | length 26.7
  Top Layer w0.381: D1.2@4.525,20.05 D1.2@4.55,20.025 ; P5.2@9,10.5 10.3,10.5 11.2,11.4 11.2,14.2 8.135,17.265 8.135,19.463 7.573,20.025 D1.2@4.55,20.025 ; P6.2@9.08,27.2 6.626,27.2 6.6,27.174 6.6,22 6.1,21.5 5.4,21.5 4.55,20.65 D1.2@4.55,20.025
CAN_P: D1.1 P5.1 P6.1 U1.7 | length 28.8
  Top Layer w0.381: D1.1 3.4,19.05 ; P5.1@9,12.5 10.565,12.5 10.565,13.835 7.5,16.9 7.5,19.2 7.325,19.375 5.618,19.375 5.293,19.05 3.4,19.05 ; P6.1@9.08,29.2 7.61,29.2 5.965,27.555 5.965,22.263 5.837,22.135 5.137,22.135 5.1,22.098 5.098,22.098 3.4,20.4 3.4,19.05
GND: C1.2 C2.2 C3.2 C4.2 C5.2 C6.2 C7.2 C8.2 C9.2 C10.2 C11.2 C12.2 C13.2 C14.2 D1.3 J1.3 J1.5 LED1.2 P1.1 P1.2 P1.3 P1.4 P1.26 P1.27 P1.28 P1.29 P2.2 Q1.4 Q1.8 Q2.4 Q2.8 R1.2 R2.2 R5.1 U1.2 U2.8 U2.23 U2.35 U2.47 Y1.2 Y1.4 | length 5.2
  Top Layer w0.254: P1.4 23.818,19.5 ; 28.666,27.722 U2.35 ; 29.428,35.27 U2.47 31.786,35.27 32.021,35.035
  other v1: 17.1,9.8 20.4,9.8 11.2,17.5 13.3,17.5 6.2,17.7 2.9,18 27.2,19.2 20.9,20.1 23.6,20.2 13.6,21.7 22.606,21.844 26.4,26.7 29.21,27.178 31.496,27.178 21,27.8 20.7,31.1 35.2,34.1 28.9,34.8 46.736,35.306 35.1,35.7 46.736,36.576 33.782,37.338 21.336,38.608 25.725,38.7 19.05,39.37 27.675,39.825 23.5,40.6 30.226,43.18 32.004,43.18 16.4,44.975
  other v2: 16.025,39.775 35.75,39.925 37.375,40.7 17.175,40.875
NetLED1_1: LED1.1 R3.2 | length 1.6
  Top Layer w0.254: LED1.1 3.339,35.256 R3.2
NRST: C14.1 J1.10 R4.2 U2.7 | length 37.9
  Top Layer w0.254: C14.1@20.1,40.575 20.419,40.894 22.352,40.894 22.352,41.402 23.114,42.164 25.992,42.164 ; U2.7@26.15,37.175 26.15,38.011 26.488,38.349 26.499,38.349 26.499,39.101 25.992,39.608 25.992,43.192 26.8,44 30,44 31.75,45.75 31.75,48.425 35.306,48.425 35.306,46.736 40.9,41.142 J1.10@40.9,39.116
PA2/USART2_TX: P1.23 U2.12 | length 29.5
  Top Layer w0.254: P1.23 23.675,10 24.106,10.432 24.106,16.906 24.537,17.337 v1(24.537,17.363) ; U2.12@23.65,37.175 23.65,36.15 23.906,35.894 23.906,30.894 v1(24.4,30.4)
  Bottom Layer w0.254: v1(24.4,30.4) 24.4,30.237 24.794,29.843 24.794,27.594 24.787,27.587 24.787,18.313 24.537,18.063 v1(24.537,17.363)
PA3/USART2_RX: P1.22 U2.13 | length 28.4
  Top Layer w0.254: U2.13 23.23,35.77 23.5,35.5 v1(23.5,30.3) ; P1.22 23.454,10.5 23.7,10.746 v1(23.7,17.8)
  Bottom Layer w0.254: v1(23.5,30.3) 24.387,29.413 24.387,27.762 24.381,27.756 24.381,18.481 v1(23.7,17.8)
PA4/SENSE_LEFT: P3.4 R1.1 U2.14 | length 61.9
  Top Layer w0.254: v1(21.1,41.892) P3.4 ; v1(21.3,36.9) 21.3,36.4 20.837,35.937 20.837,35.551 21.118,35.27 U2.14 ; v1(38.1,48.05) 38.1,45.279 42.679,40.7 46.3,40.7 47.417,39.583 47.417,34.017 44.9,31.5 41.914,31.5 40.386,29.972 R1.1
  Bottom Layer w0.254: v1(21.1,41.892) 20.3,41.092 20.3,37.9 20.532,37.668 v1(21.3,36.9) ; P3.4 21.1,48.024 21.476,48.4 37.9,48.4 38.1,48.2 v1(38.1,48.05)
PA5/SENSE_RIGHT: P4.4 R2.1 U2.15 | length 65.9
  Top Layer w0.254: v1(20.7,33.528) 20.7,34.242 21.228,34.77 U2.15 ; v1(32.177,49.127) 38.273,49.127 P4.4 40.3,43.653 42.847,41.106 46.468,41.106 47.823,39.751 47.823,33.849 45.068,31.094 43.286,31.094 42.164,29.972 R2.1
  Bottom Layer w0.254: v1(20.7,33.528) 20.7,35.637 19.819,36.518 19.819,48.219 20.727,49.127 v1(32.177,49.127)
PA9/PRECHARGE_2: P1.6 Q2.3 | length 33
  Top Layer w0.254: P1.6 28.194,18.5 28.6,18.5 v1(35.4,25.3) ; Q2.3@34.225,41.075 34.225,39.575 36.1,37.7 v1(36.1,34.4)
  Bottom Layer w0.254: v1(35.4,25.3) 35.319,25.219 35.319,29.319 36.1,30.1 v1(36.1,34.4)
PA10/PRECHARGE_1: P1.5 Q1.3 | length 31.2
  Top Layer w0.254: Q1.3 14.224,40.376 14.732,39.868 14.732,33.068 19.4,28.4 19.4,26.7 v1(21,25.1) ; P1.5 24.334,19 24.892,19.558 24.892,20.066 24.892,21.59 24.482,22 v1(23.7,22)
  Bottom Layer w0.254: v1(21,25.1) 23.949,25.1 23.975,25.075 23.975,22.675 23.7,22.4 v1(23.7,22)
PA11/CAN_RX: U1.4 U2.32 | length 23.1
  Top Layer w0.254: U1.4@9.225,20.675 9.225,21.425 12.2,24.4 v1(15.9,24.4) ; v1(23,24.4) 25.4,24.4 27.15,26.15 U2.32@27.15,28.625
  Bottom Layer w0.254: v1(15.9,24.4) v1(23,24.4)
PA12/CAN_TX: U1.1 U2.33 | length 29.7
  Top Layer w0.254: U1.1@9.225,18.725 9.225,16.937 9.462,16.7 14.9,16.7 15.2,17 v1(15.2,18) ; v1(23,23.5) 25.2,23.5 27.65,25.95 U2.33@27.65,28.625
  Bottom Layer w0.254: v1(15.2,18) 15.2,22 16.7,23.5 v1(23,23.5)
PA13/SWDIO: J1.2 U2.34 | length 20
  Top Layer w0.254: U2.34@28.15,28.625 28.15,25.952 28.402,25.7 34.225,25.7 40.9,32.375 J1.2@40.9,34.036
PA14/SWCLK: J1.4 U2.37 | length 12.3
  Top Layer w0.254: U2.37 34.083,30.27 37.594,33.781 37.594,33.794 39.106,35.306 J1.4@40.9,35.306
PB6/USART1_TX: J1.6 U2.42 | length 12
  Top Layer w0.254: U2.42 36.008,32.77 37.187,33.95 37.187,33.987 39.206,36.006 39.206,36.412 39.37,36.576 J1.6@40.9,36.576
PB7/USART1_RX: J1.8 U2.43 | length 12.9
  Top Layer w0.254: U2.43 35.933,33.27 36.781,34.118 36.781,34.156 38.8,36.175 38.8,37.53 39.116,37.846 J1.8@40.9,37.846
PC14/OSC32_IN: C12.1 U2.3 Y1.1 | length 6.3
  Top Layer w0.254: U2.3@28.15,37.175 28.15,38.05 28.6,38.5 29.7,38.5 30.3,39.1 Y1.1@30.3,40 ; Y1.1@30.3,40.5 C12.1@31.9,40.5 ; C12.1@31.627,40.727 C12.1
PC15/OSC32_OUT: C13.1 U2.4 Y1.3 | length 7.9
  Top Layer w0.254: U2.4@27.65,37.175 27.65,38.699 26.399,39.951 26.399,41.875 28.825,41.875 Y1.3@29,41.7
PRECHARGE_GND_LEFT: P3.2 Q1.1 Q1.2 Q1.5 Q1.6 Q1.7
PRECHARGE_GND_RIGHT: P4.2 Q2.1 Q2.2 Q2.5 Q2.6 Q2.7
pads on no net: J1.7 J1.9 P1. P1.7 P1.8 P1.9 P1.10 P1.11 P1.12 P1.13 P1.14 P1.15 P1.16 P1.17 P1.18 P1.19 P1.20 P1.21 P1.24 P1.25 P1.30 P1.31 P1.32 P1.33 P1.34 P1.35 P1.36 P1.37 P1.38 P1.39 P1.46 P2. P3. P4. P5.3 P6.3 U1.5 U1.8 U2.2 U2.5 U2.6 U2.10 U2.11 U2.16 U2.17 U2.18 U2.19 U2.20 U2.21 U2.22 U2.25 U2.26 U2.27 U2.28 U2.29 U2.30 U2.31 U2.38 U2.39 U2.40 U2.41 U2.45 U2.46

## Polygon pours and split planes (outlines as drawn)
GND on Top Layer "Top Layer-GND" (solid, remove dead copper, pour order 8): 0,0 50,0 50,50 0,50
PRECHARGE_GND_LEFT on Top Layer "PRECHAGE GND LEFT" (solid, remove dead copper, pour order 2): 12.954,41.402 16.764,41.402 16.764,43.688 15.24,43.688 15.24,47.9 12.954,47.9
+12V on Top Layer "Top Layer-12v" (solid, remove dead copper, pour order 4): 25.6,44.4 31.4,44.4 31.4,49.7 7.7,49.7 7.8,49.6 7.8,33.6 14.4,33.6 14.4,39.5 13,39.5 13,48.133 25.6,48.133
PRECHARGE_GND_RIGHT on Top Layer "PRECHAGE GND RIGHT" (solid, remove dead copper, pour order 0): 33.02,41.402 36.83,41.402 36.83,43.688 35.052,43.688 35.052,48.132 32.131,48.134 32.131,44.958 33.02,44.958
GND on Bottom Layer "Bottom Layer-GND" (solid, remove dead copper, pour order 6): 0,0 50,0 50,50 0,50

## Keep-outs
Keep-Out Layer:
  the board outline again, w0.6

## Other copper
Top Layer:
  rectangle net +3V3: 17.9,16 19.5,18.5
  rectangle net +12V: 17.9,19.5 19.5,21

## Silkscreen, mask and mechanical layers (free items; w line width, h text height)
Top Overlay:
  lines w0.254: 15,20.8 15,0 50,0 50,30 31.7,30 ; 15,24.638 15,28 15,30 21.1,30
  text "MOTOR / PRECHARGE LEFT" at 0.762,41.402 h0.8
  text "MOTOR / PRECHARGE RIGHT" at 42.164,40.132 h0.8
  text "PWR" at 1.016,39.37 h0.8
  text "NRST" at 36.3,38.692 h0.8
  text "NC" at 46.6,38.608 h0.8
  text "RX <-" at 35.5,37.392 h0.8
  text "NC" at 46.6,37.338 h0.8
  text "GND" at 46.6,36.192 h0.8
  text "TX ->" at 35.634,36.092 h0.8
  text "GND" at 46.6,34.892 h0.8
  text "SWCLK" at 35.5,34.792 h0.8
  text "+3V3" at 46.6,33.592 h0.8
  text "SWDIO" at 35.634,33.492 h0.8
  text "+12V" at 11.176,31.242 h0.8
  text "GND" at 14.986,31.242 h0.8
  text "CAN" at 10.5,27.8 h0.8
  text "CAN" at 10.414,11.176 h0.8
Bottom Overlay:
  text "+12V" at 12.5,44.7 h0.8
  text "+12V" at 31.7,44.7 h0.8
  text "+3V3" at 19.4,44.6 h0.8
  text "+3V3" at 38.6,44.6 h0.8
  text "SENSE" at 23.1,43.2 h0.8
  text "SENSE" at 42.3,43.2 h0.8
  text "PRECHARGE / GND" at 17.5,41.9 h0.8
  text "PRECHARGE / GND" at 36.7,41.9 h0.8
  text "MSXII MOTOR CONTROLLER / CAN INTERFACE / REV 1.11" at 49.1,30 h0.8